# Altium PCB PCB.PcbDoc
Units mm, origin at the board's own origin, x right, y up, seen from the top; angles counter-clockwise.
Board outline 73.7 x 34 mm, 2 copper layers (Top Layer, Bottom Layer); 17 components, 13 nets, 70 pads, 7 vias.
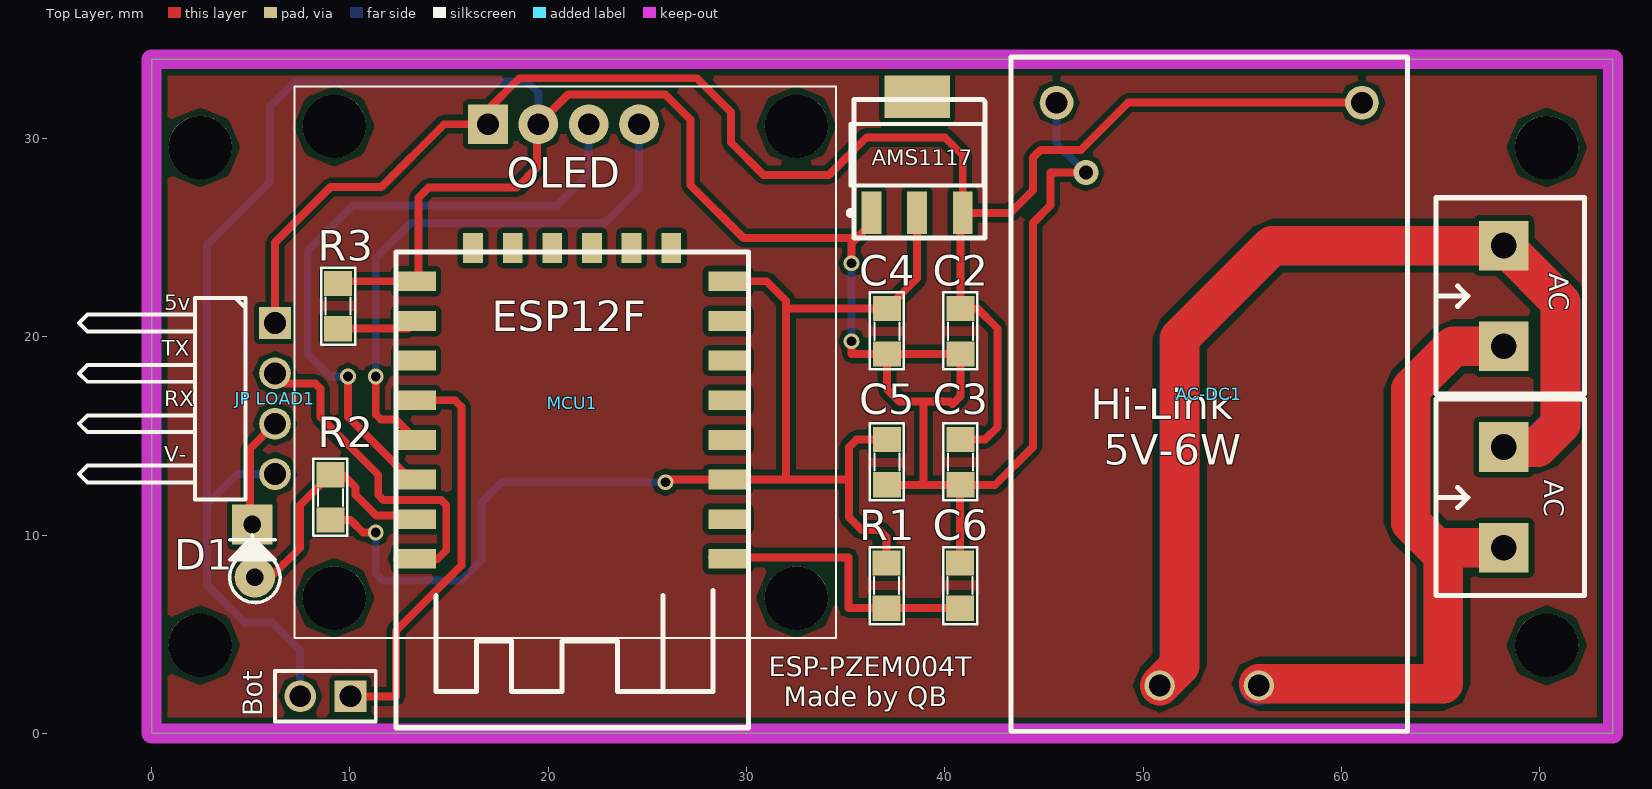
[diagram p0: Top Layer view]
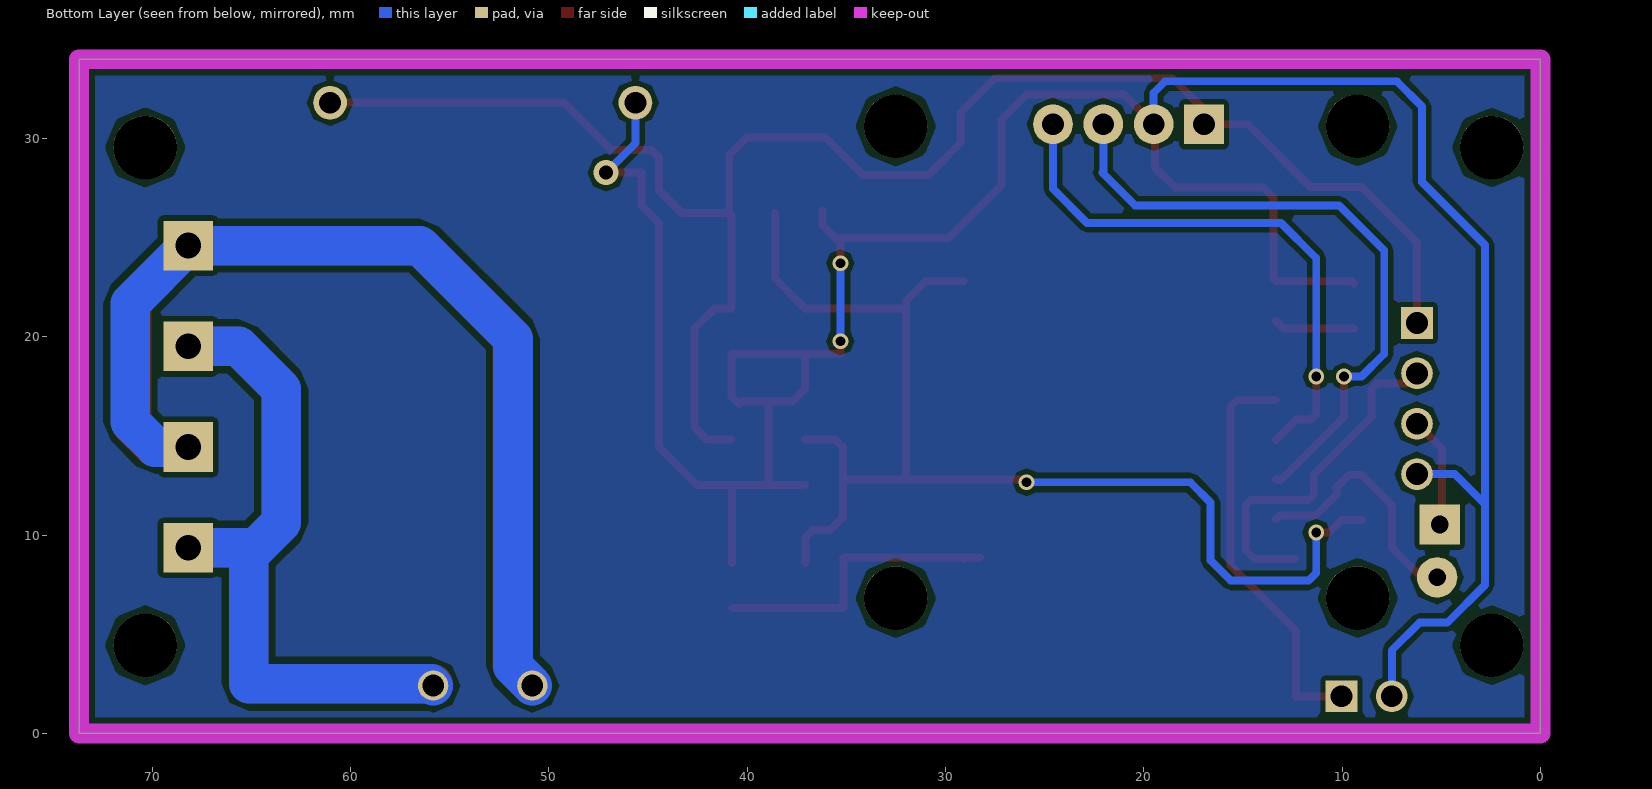
[diagram p1: Bottom Layer view, seen from below]
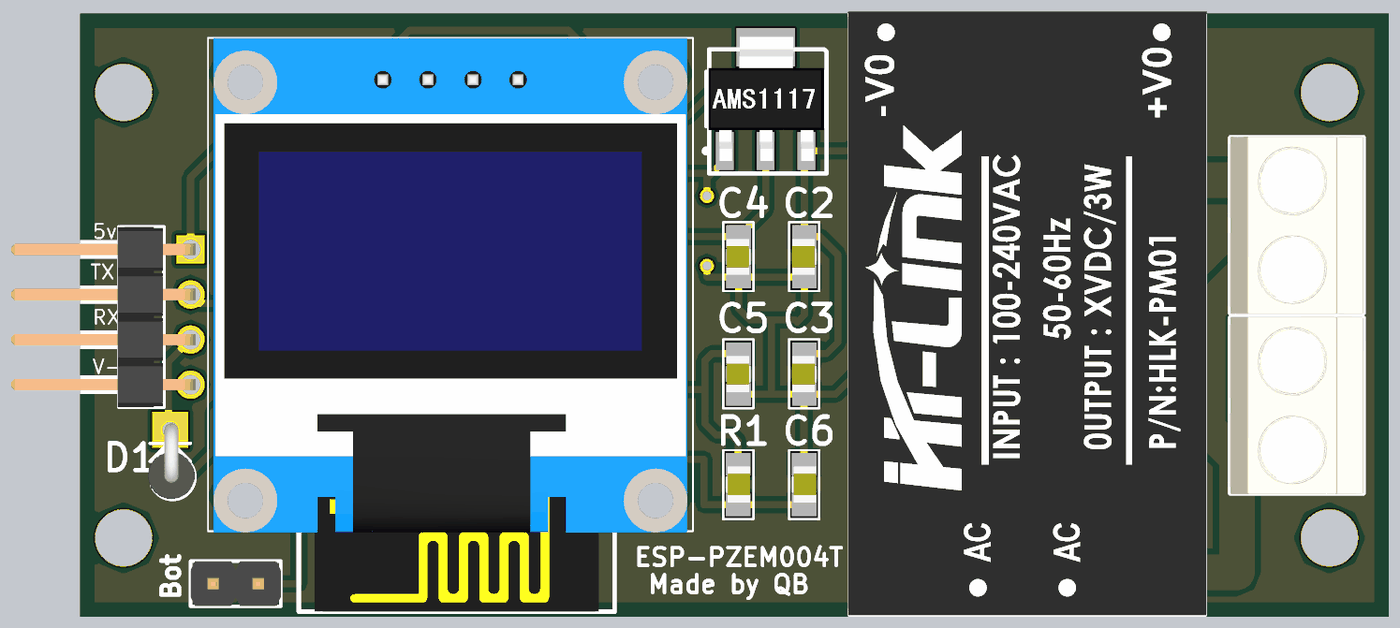
[diagram p2: 3D render of the assembled board from above, using the file's embedded part models]

## Layer stack, top to bottom
Top Solder: solder mask 0.0102, Solder Resist, Dk 3.5
Top Layer: signal copper 0.0356
Dielectric 1: dielectric 0.32, FR-4, Dk 4.8
Bottom Layer: signal copper 0.0356
Bottom Solder: solder mask 0.0102, Solder Resist, Dk 3.5

## Board outline
0,0 73.7,0 73.7,34 0,34

## Design rules (kind name [scope] priority, off if disabled: settings)
Clearance [All] p1: gap=0.254 ignorepadtopadclearanceinfootprint=FALSE except(0: Arc-Hole Track-Hole SMDPad-Hole THPad-Hole Via-Hole Fill-Hole Poly-Hole Region-Hole Text-Hole)
PolygonConnect [All] p1: connectstyle=Relief reliefconductorwidth=0.254 reliefentries=4 polygonreliefangle="90 Angle" airgapwidth=0.254
RoutingVias [All] p1: holewidth=0.711 width=1.27 viastyle="Through Hole" minholewidth=0.711 minwidth=1.27 maxholewidth=0.711 maxwidth=1.27
SolderMaskExpansion [All] p1: expansion=0.102
Width [All] p1: maxlimit=3 minlimit=0.2 preferedwidth=0.4
30 further rules are at their usual default settings.

## Classes and differential pairs
component class Schematic: AC AC-DC1 AMS1117 Bot C2 C3 C4 C5 C6 D1 "JP LOAD1" MCU1 OLED R1 R2 R3

## Components (designator, comment, footprint, x,y, rotation, side; value= is the part's Value field where it differs from the comment)
AC "KF2" KF2-5.08 68.199,11.906 r90 top (schematic designator AC2)
AC "KF2" KF2-5.08 68.199,22.066 r90 top (schematic designator AC1)
AC-DC1 "Hi-link 5v" Hi-Link 53.34,17.113 r90 top
AMS1117 "AMS1117 3.3V" AMS-1117 38.735,28.416 r0 top (schematic designator AMS1)
Bot "JP2" JP2-D1T 10.033,1.873 r180 top (schematic designator Boot1)
C2 "10uF" 0805 40.792,20.288 r270 top
C3 "1uF" 0805 40.792,13.684 r270 top
C4 "10uF" 0805 37.084,20.288 r270 top
C5 "1uF" 0805 37.084,13.684 r270 top
C6 "1uF" 0805 40.767,7.461 r90 top
D1 "Diode" DIO-1AN 5.08,9.271 r270 top value=1N5007
"JP LOAD1" "JP4" JP4-D1C 3.683,11.811 r270 top
MCU1 "" Esp12 21.209,12.287 r180 top
OLED "Oled 0.96inch" "Oled 0.96" 20.862,18.726 r0 top (schematic designator Oled1)
R1 "10K" 0805 37.059,7.461 r90 top
R2 "4.7K" 0805 9.017,11.906 r270 top
R3 "10K" 0805 9.398,21.558 r90 top

## Footprints (in the part's own frame and the unit in brackets; to place one, negate y for a bottom-side part, rotate by r counter-clockwise, add the part's x,y. Pads: shape width x height; smd on the part's side, far side on the other; paste and mask are expansions set on the pad)
0805 [mil] "Compoment SMD 80x50mil"
  rect 50x55 smd: 1(-45,0) 2(45,0)
  silkscreen extent -77,-34 76,33, body extent -40,-27 40,23, height 24
AMS-1117 [mm]
  rect 1x2.15 smd: 1(-2.427,-2.163) 2(-0.127,-2.163) 3(2.173,-2.163)
  rect 3.3x2.15 smd: 4(-0.127,3.687)
  silkscreen extent -3.6,-3.43 3.3,3.56, body extent -3.37,-2.74 3.19,4.26, height 2.04
DIO-1AN [mil] "Diode 1A, W 100mil, L 150mil"
  round 80 hole 35: 1(55,5)
  rect 80x80 hole 35: 2(-50,0)
  silkscreen extent -30,-45 105,55, body extent -64,-50 104,55, height 252
Esp12 [mm]
  rect 2x1 smd: 1(-7.874,3.48) 2(-7.874,1.48) 3(-7.874,-0.52) 4(-7.874,-2.52) 5(-7.874,-4.52) 6(-7.874,-6.52) 7(-7.874,-8.52) 8(-7.874,-10.52) 15(7.874,-10.52) 16(7.874,-8.52) 17(7.874,-6.52) 18(7.874,-4.52) 19(7.874,-2.52) 20(7.874,-0.52) 21(7.874,1.48) 22(7.874,3.48)
  rect 1x1.5 smd: 9(-5,-12.192) 10(-3,-12.192) 11(-1,-12.192) 12(1,-12.192) 13(3,-12.192) 14(5,-12.192)
  silkscreen extent -8.89,-12 8.89,12, body extent -8.01,-12 8,12, height 2.65
Hi-Link [mm]
  round 1.524 hole 1.1: 1(-14.7,2.5) 2(-14.7,-2.5)
  round 1.7 hole 1.1: 3(14.7,7.7) 4(14.7,-7.7)
  silkscreen extent -17,-10 17,10, body extent -17.02,-10.1 16.98,10.1, height 15.01
JP2-D1T [mm] "2 pins, 1 row, straight, gold plating"
  rect 1.6x1.6 hole 1.1: 1(0,0)
  round 1.6 hole 1.1: 2(2.54,0)
  silkscreen extent -1.27,-1.27 3.81,1.27, body extent -1.27,-1.27 3.81,1.27, height 8.54
JP4-D1C [mm] "4 pins, 1 row, right angled, gold plating"
  rect 1.6x1.6 hole 1.1: 1(-8.89,2.54)
  round 1.6 hole 1.1: 2(-6.35,2.54) 3(-3.81,2.54) 4(-1.27,2.54)
  silkscreen extent -10.16,-7.34 0,1.04, body extent -10.16,-7.57 0,2.79, height 2.54
KF2-5.08 [mm]
  rect 2.5x2.5 hole 1.3: 1(-2.54,0) 2(2.54,0)
  silkscreen extent -4.95,-4.08 4.95,3.43, body extent -5,-4.07 5,3.43, height 10
"Oled 0.96" [mm]
  rect 2x2 hole 1.1: 1(-3.9,12)
  round 2 hole 1.1: 2(-1.36,12) 3(1.18,12) 4(3.72,12)
  round 3.2 hole 3.2: 6(-11.65,-11.9) 7(11.65,-11.9) 8(-11.65,11.9) 9(11.65,11.9)
  silkscreen extent -13.65,-13.9 13.65,13.9, body extent -13.35,-13.97 13.35,13.89, height 8.47

## Part data
AC AC: Manufacturer="Würth Elektronik eiSos GmbH", partNo=691103110002, ComponentLink1 Description=Manufacturer, ComponentLink1URL=http://www.we-online.com, ComponentLink2 Description=Datasheet, ComponentLink2URL=http://katalog.we-online.de/em/datasheet/6911031100xx.pdf, Created by="Karrer Zheng", Created Date="29 October 2013", NoPins=2
Bot: "WR-PHD 2.54 mm Angled Socket Header", Manufacturer="Würth Elektronik eiSos GmbH", partNo=613002143121, ComponentLink1 Description=Manufacturer, ComponentLink1URL=http://www.we-online.com, ComponentLink2 Description=Datasheet, ComponentLink2URL=http://katalog.we-online.de/em/datasheet/6130xx143121.pdf, Created by="Karrer Zheng", Created Date="29 March 2013", NoPins=02
C2 C3 C4 C5 C6: library part "C104 SMD", "0603 SMD CAP"
D1: "Default Diode", Code - JEDEC=DO-214-AB, Published=8-Jun-2000, Publisher="Altium Limited", Revision="July-2002: Re-released for DXP Platform."
"JP LOAD1": "WR-PHD 2.54 mm Angled Socket Header", Manufacturer="Würth Elektronik eiSos GmbH", partNo=613004143121, ComponentLink1 Description=Manufacturer, ComponentLink1URL=http://www.we-online.com, ComponentLink2 Description=Datasheet, ComponentLink2URL=http://katalog.we-online.de/em/datasheet/6130xx143121.pdf, Created by="Karrer Zheng", Created Date="29 March 2013", NoPins=04
MCU1: library part ESP12F
R1 R2 R3: library part "0603 Res"

## Free pads (board coordinates)
  round 3.2 hole 3.2: 1(2.45,4.45) 2(2.45,29.55) 3(70.361,29.55) 4(70.361,4.45)

## Via types
v1: diameter 0.8, hole 0.5, Top Layer to Bottom Layer, 6 vias
v2: diameter 1.27, hole 0.711, Top Layer to Bottom Layer, 1 vias

## Nets (pads, with @x,y where several pads share a name; then routed paths per layer and width w, separated by ;. In a path a pad name is that pad's centre, name@x,y a point inside that pad or via, vN(x,y) a via of type N, cw(c..) or ccw(c..) an arc to the next point about the centre after c; other vN are vias at no path point)
3.3V: AMS1117.2 C4.1 C5.1 MCU1.3 MCU1.8 R1.2 R2.2 | length 64.7
  Top Layer w0.4: R2.2 10.033,10.763 10.668,10.128 v1(11.303,10.128) ; v1(25.908,12.668) 26.047,12.807 MCU1.3 32.004,12.807 ; MCU1.8 31.009,22.807 32.004,21.812 32.004,21.558 ; R1.2 37.059,9.899 36.703,10.255 35.814,10.255 35.179,10.89 35.179,12.795 ; C5.1 35.56,14.827 35.179,14.446 35.179,12.795 ; AMS1117.2 38.608,22.955 C4.1 32.131,21.431 ; 32.004,12.807 32.004,21.431 ; 32.004,12.807 35.167,12.807 35.179,12.795 ; 32.004,21.431 32.131,21.431 ; 32.004,21.431 32.004,21.558 ; 32.004,21.558 32.131,21.431
  Bottom Layer w0.4: v1(11.303,10.128) 11.303,8.096 11.684,7.715 15.621,7.715 16.637,8.731 16.637,11.652 17.653,12.668 v1(25.908,12.668)
5V: "JP LOAD1.1" AC-DC1.4 AMS1117.3 C2.1 C3.1 OLED.1 | length 87.3
  Top Layer w0.4: 6.223,20.701 6.223,24.765 9.017,27.559 11.589,27.559 14.756,30.726 OLED.1 16.962,31.466 18.542,33.046 27.501,33.046 29.21,31.337 29.21,29.813 30.861,28.162 34.163,28.162 36.068,30.067 40.005,30.067 40.908,29.164 AMS1117.3 ; C3.1 42.037,14.827 42.672,15.462 42.672,20.415 41.656,21.431 C2.1 40.792,26.137 AMS1117.3 ; AC-DC1.4 49.244,31.813 46.863,29.432 44.831,29.432 44.45,29.051 44.45,27.4 43.303,26.253 AMS1117.3
GND: "JP LOAD1.4" AC-DC1.3 AMS1117.1 Bot.2 C2.2 C3.2 C4.2 C5.2 C6.2 MCU1.15 OLED.2 R3.2 | length 150.2
  Top Layer w0.4: R3.2 9.504,22.807 MCU1.15 13.462,22.934 13.462,27.019 13.97,27.527 18.415,27.527 19.431,28.543 19.431,30.655 OLED.2 21.002,32.226 25.908,32.226 27.178,30.956 27.178,27.654 29.845,24.987 35.56,24.987 ; v1(35.306,19.78) 35.306,19.145 C4.2 ; v1(35.306,23.717) 35.306,24.733 35.56,24.987 ; AMS1117.1@36.195,26.366 36.195,25.622 35.56,24.987 ; C5.2 38.938,12.541 ; C6.2 40.767,12.516 C3.2 ; AC-DC1.3 AC-DC1.3@45.72,31.733 ; v2(47.117,28.289) 45.339,28.289 45.339,26.638 44.45,25.749 44.45,14.446 42.545,12.541 C3.2 ; C4.2 C2.2 40.792,17.011 40.386,16.605 40.259,16.732 38.938,16.732 ; C4.2 37.084,17.367 37.719,16.732 38.938,16.732 ; 38.938,12.541 38.938,16.732 ; 38.938,12.541 C3.2
  Bottom Layer w0.4: 6.223,13.081 4.318,13.081 2.794,11.557 ; Bot.2 7.493,4.191 6.096,5.588 4.699,5.588 2.794,7.493 2.794,11.557 ; OLED.2 19.502,32.314 18.923,32.893 7.239,32.893 5.969,31.623 5.969,27.813 2.794,24.638 2.794,11.557 ; v1(35.306,19.78) v1(35.306,23.717) ; AC-DC1.3 45.64,29.766 v2(47.117,28.289)
gpio0: Bot.1 MCU1.18 | length 20.7
  Top Layer w0.4: Bot.1 12.319,1.873 12.319,5.175 15.621,8.477 15.621,16.478 15.292,16.807 MCU1.18
L: AC-DC1.2 AC.1 | length 67.5
  Top Layer w2: AC-DC1.2@55.84,2.508 65.151,2.508 65.151,9.366 ; AC.1@68.199,9.366 65.151,9.366 ; AC.1@68.199,19.526 65.659,19.526 63.5,17.367 63.5,10.636 64.77,9.366 65.151,9.366
  Bottom Layer w2: AC-DC1.2 55.935,2.508 65.151,2.508 65.151,9.366 ; AC.1@68.199,9.366 65.151,9.366 ; AC.1@68.199,19.526 65.659,19.526 63.5,17.367 63.5,10.636 64.77,9.366 65.151,9.366
N: AC-DC1.1 AC.2 | length 99.5
  Top Layer w2: AC-DC1.1 51.856,3.429 51.856,19.947 56.515,24.606 68.199,24.606 71.057,21.748 71.057,15.589 69.914,14.446 AC.2@68.199,14.446
  Bottom Layer w2: AC-DC1.1 51.816,3.389 51.816,19.907 56.515,24.606 68.199,24.606 71.12,21.685 71.12,15.716 69.85,14.446 AC.2@68.199,14.446
NetMCU1_16: MCU1.16 R3.1 | length 4.1
  Top Layer w0.4: R3.1 12.943,20.415 MCU1.16
RESET: C6.1 MCU1.1 R1.1 | length 15.2
  Top Layer w0.4: MCU1.1@28.267,8.88 MCU1.1@29.156,8.88 ; MCU1.1 MCU1.1@29.156,8.88 ; C6.1 R1.1 35.137,6.318 35.137,8.88 MCU1.1@29.156,8.88
RX: D1.1 MCU1.21 R2.1 | length 12.7
  Top Layer w0.4: D1.1 6.001,7.874 7.493,9.366 7.493,11.525 R2.1 9.652,13.049 10.287,12.414 10.287,12.033 11.338,10.982 13.16,10.982 MCU1.21
RXD: "JP LOAD1.3" D1.2 | length 5.6
  Top Layer w0.4: D1.2 4.969,10.652 4.969,14.367 6.223,15.621
SCL: MCU1.20 OLED.3 | length 32.8
  Top Layer w0.4: v1(9.906,18.002) 9.906,15.97 13.069,12.807 MCU1.20
  Bottom Layer w0.4: v1(9.906,18.002) 9.017,18.002 7.874,19.145 7.874,24.352 10.16,26.638 20.447,26.638 22.098,28.289 22.042,28.345 OLED.3
SDA: MCU1.19 OLED.4 | length 28.4
  Top Layer w0.4: v1@11.303,18.129 v1(11.303,18.002) 11.303,16.097 11.557,15.843 12.299,15.843 MCU1.19
  Bottom Layer w0.4: v1@11.303,18.129 11.303,23.971 13.081,25.749 22.86,25.749 24.582,27.471 OLED.4
TX: "JP LOAD1.2" MCU1.22 | length 17.8
  Top Layer w0.4: 6.223,18.161 6.731,17.653 8.255,17.653 8.509,17.399 8.509,15.97 11.43,13.049 11.43,12.033 11.684,11.779 14.605,11.779 14.859,11.525 14.859,9.239 14.427,8.807 MCU1.22 MCU1.22@12.37,8.807
pads on no net: AMS1117.4 MCU1.2 MCU1.4 MCU1.5 MCU1.6 MCU1.7 MCU1.9 MCU1.10 MCU1.11 MCU1.12 MCU1.13 MCU1.14 MCU1.17 OLED.6 OLED.7 OLED.8 OLED.9

## Polygon pours and split planes (outlines as drawn)
no net on Bottom Layer "Botton Layer-No Net 1" (solid, pour order 8): 73.7,34 73.7,0 0,0 0,34
no net on Top Layer "Botton Layer-No Net 1" (solid, pour order 10): 0,34 0,0 73.7,0 73.7,34

## Keep-outs
Keep-Out Layer:
  the board outline again, w1

## Silkscreen, mask and mechanical layers (free items; w line width, h text height)
Top Overlay:
  text "5v" at 0.635,21.336 h0.8
  text "TX" at 0.508,19.05 h0.8
  text "RX" at 0.635,16.51 h0.8
  text "V-" at 0.635,13.716 h0.8
  text "ESP-PZEM004T" at 31.115,2.889 h1
  text "Made by QB" at 31.877,1.365 h1

## Text inside footprints (layer, text, board x,y; h text height)
AC-DC1: Top Overlay "Hi-Link  /  5V-6W" at 47.371,13.557 h1.52
MCU1: Top Overlay "ESP12F" at 17.145,20.288 h1.52